# EAGLE board se8 (EAGLE 6.5.0)
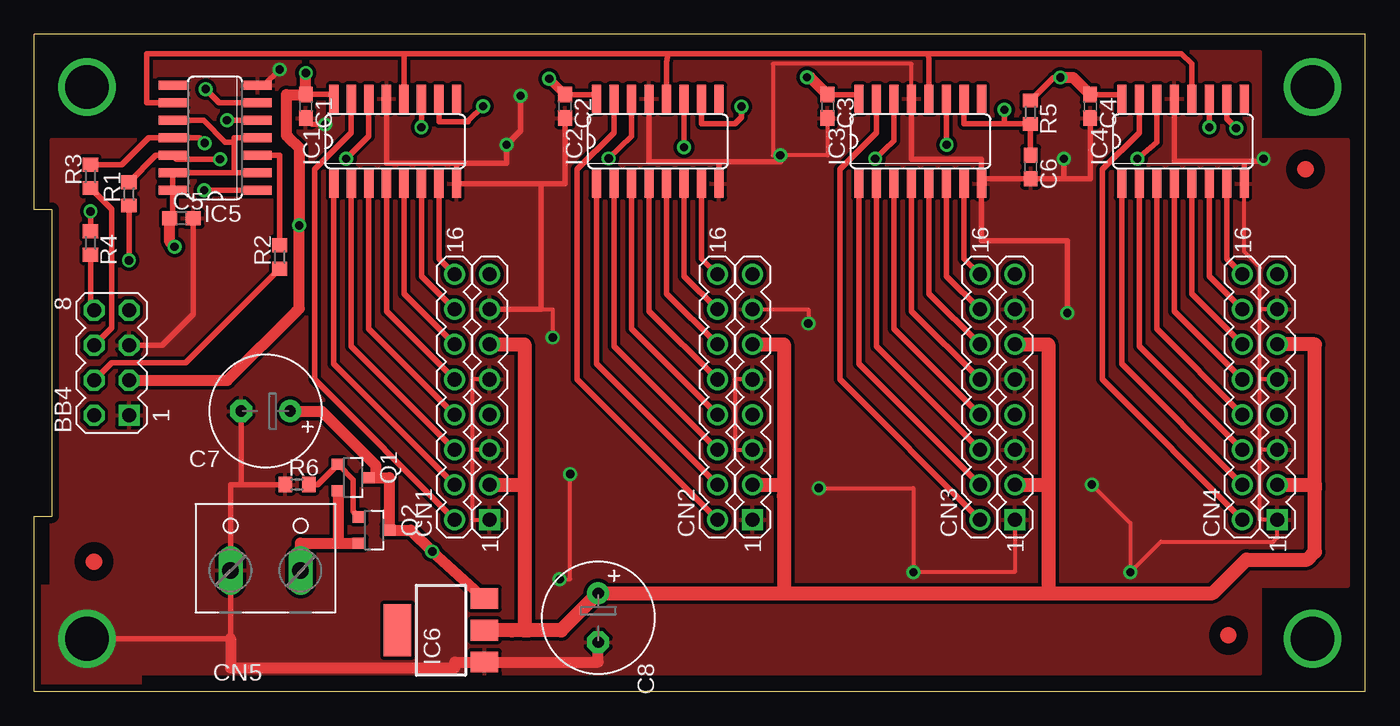
[diagram p0: board, top side]
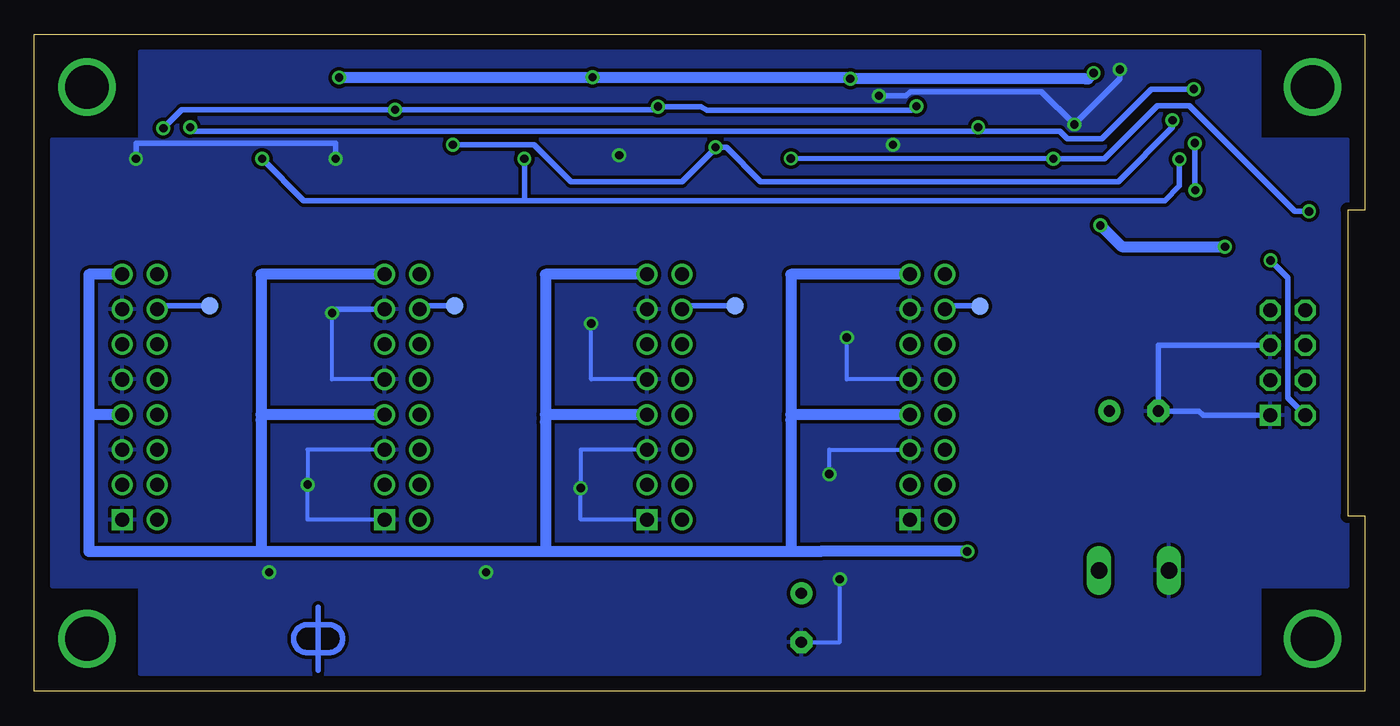
[diagram p1: board, bottom side, seen from below]

Size 96.52 x 47.62 mm. Coordinates in mm from the lower left corner, seen from the top.
Outline: 0,0 96.52,0 96.52,47.62 0,47.62 0,34.92 1.27,34.92 1.27,12.7 0,12.7 0,0
Copper layers (1*16): Top 0.035mm / dielectric 1.5mm / Bottom 0.035mm
Design rules "default *": minimum track width 10mil, minimum drill 20mil, track to track 10mil, track to pad 10mil, pad to pad 10mil, via to via 10mil, smd to smd 10mil, copper to edge 20mil, drill to drill 10mil, minimum pad ring 10mil, minimum via ring 8mil, stop-mask expansion 4mil, vias tented up to drill 0mil, thermal gap 10mil

## Footprints (pad centres in the part's own frame; a part is rotated, then mirrored left to right if it is on the bottom)
HDR-4X2 = drill 1.016 square: 1 -3.81,-1.27 | drill 1.016 octagon: 2 -3.81,1.27; 3 -1.27,-1.27; 4 -1.27,1.27; 5 1.27,-1.27; 6 1.27,1.27; 7 3.81,-1.27; 8 3.81,1.27
C0603 = smd 1.1 x 1: 1 -0.85,0; 2 0.85,0
E3.5-8 = drill 0.813 pad 1.6: + -1.778,0 | drill 0.813 pad 1.6 octagon: - 1.778,0
HDR-8X2 = drill 1.016 square: 1 -8.89,-1.27 | drill 1.016: 2 -8.89,1.27; 3 -6.35,-1.27; 4 -6.35,1.27; 5 -3.81,-1.27; 6 -3.81,1.27; 7 -1.27,-1.27; 8 -1.27,1.27; 9 1.27,-1.27; 10 1.27,1.27; 11 3.81,-1.27; 12 3.81,1.27; 13 6.35,-1.27; 14 6.35,1.27; 15 8.89,-1.27; 16 8.89,1.27
TBLK-5.08-X2 = drill 1.194 long: 1 -2.54,-0.127; 2 2.54,-0.127
TEST-POINT = smd 1.27 x 1.27: P1 0,0
SO16 = smd 0.66 x 2.032: 1 -4.445,-3.073; 2 -3.175,-3.073; 3 -1.905,-3.073; 4 -0.635,-3.073; 5 0.635,-3.073; 6 1.905,-3.073; 7 3.175,-3.073; 8 4.445,-3.073; 9 4.445,3.073; 10 3.175,3.073; 11 1.905,3.073; 12 0.635,3.073; 13 -0.635,3.073; 14 -1.905,3.073; 15 -3.175,3.073; 16 -4.445,3.073
SO14 = smd 0.66 x 2.032: 1 -3.81,-3.073; 2 -2.54,-3.073; 3 -1.27,-3.073; 4 0,-3.073; 5 1.27,-3.073; 6 2.54,-3.073; 7 3.81,-3.073; 8 3.81,3.073; 9 2.54,3.073; 10 1.27,3.073; 11 0,3.073; 12 -1.27,3.073; 13 -2.54,3.073; 14 -3.81,3.073
SOT223 = smd 1.5 x 2: 1 -2.3,-3.15; 2 0,-3.15; 3 2.3,-3.15 | smd 3.8 x 2: 4 0,3.15
SOT23 = smd 0.8 x 0.9: 1 -0.95,-1.1; 2 0.95,-1.1; 3 0,1.1
R0603 = smd 1 x 1.1: 1 -0.85,0; 2 0.85,0

## Placement (x,y rotation side)
BB4  BB4 Header  [HDR-4X2]  5.59,23.81 90 top
C1  0.1uF  [C0603]  19.68,42.42 270 top
C2  0.1uF  [C0603]  38.48,42.42 270 top
C3  0.1uF  [C0603]  57.53,42.42 270 top
C4  0.1uF  [C0603]  76.58,42.42 270 top
C5  0.1uF  [C0603]  10.67,34.29 0 top
C6  0.1uF  [C0603]  72.26,38.02 270 top
C7  100uF  [E3.5-8]  16.76,20.32 180 top
C8  100uF  [E3.5-8]  40.89,5.33 270 top
CN1  HDR-8X2-SHR  [HDR-8X2]  31.75,21.34 90 top
CN2  HDR-8X2-SHR  [HDR-8X2]  50.8,21.34 90 top
CN3  HDR-8X2-SHR  [HDR-8X2]  69.85,21.34 90 top
CN4  HDR-8X2-SHR  [HDR-8X2]  88.9,21.34 90 top
CN5  [TBLK-5.08-X2]  16.76,8.89 0 top
E$1  [TEST-POINT]  27.94,27.91 0 bottom
E$2  [TEST-POINT]  45.72,27.94 0 bottom
E$3  [TEST-POINT]  66.04,27.97 0 bottom
E$4  [TEST-POINT]  83.82,27.94 0 bottom
E$25  [P_FRAME]  0,0 0 top
IC1  74HC595  [SO16]  26.16,39.88 0 top
IC2  74HC595  [SO16]  45.21,39.88 0 top
IC3  74HC595  [SO16]  64.26,39.88 0 top
IC4  74HC595  [SO16]  83.31,39.88 0 top
IC5  74HC74  [SO14]  13.11,40.13 90 top
IC6  NCP1117A  [SOT223]  29.49,4.42 90 top
Q1  DMP2035  [SOT23]  23.11,15.49 270 top
Q2  DMP2035  [SOT23]  24.64,11.68 270 top
R1  100  [R0603]  6.86,36.07 90 top
R2  100  [R0603]  17.78,31.5 90 top
R3  100  [R0603]  4.06,37.34 90 top
R4  100  [R0603]  4.06,32.51 270 top
R5  330  [R0603]  72.24,41.99 270 top
R6  100K  [R0603]  19.05,14.99 0 top
U$1  [P_FRAME]  0,0 0 top
U$2  DP_FRAME_P  [P_FRAME]  -2.54,-2.54 0 top
U$4  [FIDUCIAL]  86.61,4.06 270 top
U$5  [FIDUCIAL]  4.32,9.4 0 top
U$6  [FIDUCIAL]  92.2,37.85 0 top
U$7  [DPI-1]  75.95,3.81 0 bottom

## Library data of the parts
BB4 = dpi-conn; VENDOR: Digikey; VENDOR-PART-NUM: 609-3530-ND
C1-C6 = dpi-passive; VENDOR: Digikey; VENDOR-PART-NUM: 1276-1126-2-ND
C7 C8 = dpi-passive; VENDOR: Digikey; VENDOR-PART-NUM: 399-6548-ND
CN1-CN4 = dpi-conn; VENDOR: Digikey; VENDOR-PART-NUM: S9171-ND
CN5 = dpi-conn; VENDOR: Digikey; VENDOR-PART-NUM: ED2609-ND
E$1-E$4 = dpi-conn
E$25 U$1 U$2 = dpi-sym
IC1-IC4 = dpi-transic; VENDOR: Digikey; VENDOR-PART-NUM: 74HC595D(BJ)CT-ND
IC5 = dpi-transic; VENDOR: Digikey; VENDOR-PART-NUM: 568-4458-1-ND
IC6 = dpi-transic; VENDOR: Digikey; VENDOR-PART-NUM: NCP1117LPST33T3GOSCT-ND
Q1 Q2 = dpi-transic; VENDOR: Digikey; VENDOR-PART-NUM: DMP2035U-7DICT-ND
R1-R4 = dpi-passive; VENDOR: Digikey; VENDOR-PART-NUM: 311-100HRTR-ND
R5 = dpi-passive; VENDOR: Digikey; VENDOR-PART-NUM: 311-330HRTR-ND
R6 = dpi-passive; VENDOR: Digikey; VENDOR-PART-NUM: 311-100KHRTR-ND
U$4-U$7 = DP

## Nets
+3V3: BB4.3 C1.1 C2.1 C3.1 C4.1 C5.1 IC1.16 IC2.16 IC3.16 IC4.16 IC5.2 IC5.4 IC5.10 IC5.13 IC5.14 R5.1
GND: BB4.1 BB4.5 C1.2 C2.2 C3.2 C4.2 C5.2 C6.2 C7.- C8.- CN1.1 CN1.5 CN1.9 CN1.13 CN2.1 CN2.5 CN2.9 CN2.13 CN3.1 CN3.5 CN3.9 CN3.13 CN4.1 CN4.5 CN4.9 CN4.13 CN5.1 IC1.8 IC1.13 IC2.8 IC2.13 IC3.8 IC3.13 IC4.8 IC4.13 IC5.7 IC6.1 R6.1
N$1: BB4.8 R4.2
N$2: CN4.2 IC4.15
N$3: IC1.12 IC2.12 IC3.12 IC4.12 IC5.9
N$4: IC2.11 IC3.11 IC5.5
N$7: CN4.4 IC4.1
N$8: CN4.6 IC4.2
N$9: CN4.8 IC4.3
N$10: CN4.10 IC4.4
N$12: CN4.12 IC4.5
N$13: CN4.14 IC4.6
N$14: CN4.16 IC4.7
N$15: CN3.2 IC3.15
N$16: CN3.4 IC3.1
N$17: CN3.6 IC3.2
N$18: CN3.8 IC3.3
N$19: CN3.10 IC3.4
N$20: CN3.12 IC3.5
N$21: CN3.14 IC3.6
N$22: CN3.16 IC3.7
N$23: CN2.2 IC2.15
N$24: CN2.4 IC2.1
N$25: CN2.6 IC2.2
N$26: CN2.8 IC2.3
N$28: CN2.10 IC2.4
N$29: CN2.12 IC2.5
N$30: BB4.2 R1.1
N$31: CN2.14 IC2.6
N$32: CN2.16 IC2.7
N$34: IC5.3 R2.2
N$35: IC3.14 IC4.14 IC5.12 R1.2
N$36: IC5.1 IC5.11 R3.2
N$37: IC1.14 IC2.14 R4.1
N$38: BB4.6 R3.1
N$39: IC1.11 IC4.11 IC5.6
N$41: BB4.4 R2.1
N$42: CN1.2 IC1.15
N$56: CN1.4 IC1.1
N$61: CN1.6 IC1.2
N$65: CN1.8 IC1.3
N$66: C6.1 IC1.10 IC2.10 IC3.10 IC4.10 R5.2
N$67: CN1.10 IC1.4
N$72: CN1.12 IC1.5
N$74: CN1.14 IC1.6
N$76: CN1.16 IC1.7
N$77: C7.+ CN1.7 CN1.15 CN2.7 CN2.15 CN3.7 CN3.15 CN4.7 CN4.15 IC6.3 Q1.3 Q2.3
N$79: CN5.2 Q1.2 Q2.2
N$80: Q1.1 Q2.1 R6.2
N$82: C8.+ CN1.3 CN1.11 CN2.3 CN2.11 CN3.3 CN3.11 CN4.3 CN4.11 IC6.2
VCC: BB4.7

## Tracks (layer width: path | path; a pad name or v marks a point on that pad's centre or on a via)
+3V3  (via drill 0.6)
  Top 0.406: C4.1 78.87,43.27 IC4.16 | C3.1 59.82,43.27 IC3.16 | C2.1 40.77,43.27 IC2.16 | 21.72,43.27 IC1.16 21.72,43.29 19.71,43.29 | C5.1 10.03,34.29 IC5.14 IC5.13 14.5,37.59 | 14.5,37.59 IC5.2 | IC5.4 14.5,40.13 14.5,39.73 | R5.1 73.9,44.5 v74.42,44.5 | 14.5,39.73 14.5,37.59 | IC5.10 12.27,41.4 13.84,39.83 14.4,39.83 14.5,39.73
  Top 0.61: C2.1 v37.34,44.41
  Top 0.813: BB4.3 13.98,22.54 18.97,27.53 19.2,27.76 v19.2,33.78 19.2,39.4 18.41,40.18 18.29,40.31 18.29,43.27 C1.1 | v10.16,32.23 9.82,32.58 C5.1 | C1.1 19.71,43.29 | C3.1 56.27,44.53 v56.03,44.53 | C4.1 75.35,44.5 v74.42,44.5 | C1.1 v19.68,44.83
  Bottom 0.813: v19.2,33.78 17.65,32.23 v10.16,32.23 | v74.42,44.5 74.4,44.53 v56.03,44.53 37.34,44.53 v37.34,44.41 20.28,44.41 20.11,44.41 v19.68,44.83
GND  (via drill 0.6, 3.17 pad 3.17)
  Top 0.305: 88.9,17.25 88.9,12.45 CN4.1 90.17,11.15 89.86,10.85 81.71,10.85 v79.5,8.64 79.5,12.19 v76.71,14.99 | 88.9,17.25 88.9,22.63 | 88.9,22.63 88.9,27.58 | 88.9,27.58 88.9,30.73 87.76,31.88 IC4.8 | CN4.13 88.9,27.69 88.9,27.58 | CN4.9 88.9,22.61 88.9,22.63 | CN4.5 88.9,17.53 88.9,17.25 | CN3.1 71.12,8.64 v63.75,8.64 63.75,14.73 v56.9,14.73 | CN2.13 56.13,27.69 v56.13,26.67 | CN2.9 50.8,22.61 50.8,17.53 CN2.5 | v38.1,8.13 38.86,8.13 v38.86,15.75 | CN1.5 31.75,17.53 | 31.75,17.53 31.75,12.45 CN1.1 | 36.75,27.69 37.59,27.69 v37.59,25.65 | CN1.9 31.75,22.61 31.75,17.53 | IC3.13 63.63,45.49 53.57,45.49 53.57,38.86 v54.1,38.86 57.53,38.86 C3.2
  Top 0.406: 74.91,37.17 C6.2 68.71,37.17 IC3.8 | 74.91,37.17 76.58,37.17 C4.2 | 36.75,36.8 IC1.8 30.61,38.3 | 36.75,36.8 38.48,36.8 C2.2 | BB4.5 9.26,25.08 11.46,27.28 11.52,27.34 C5.2 | IC3.8 68.71,38.58 66.8,38.58 63.63,38.58 IC3.13 | IC4.13 82.68,38.43 85.9,38.43 87.76,38.43 | 87.76,38.43 IC4.8 | IC2.13 44.58,38.38 47.9,38.38 49.66,38.38 | 49.66,38.38 IC2.8 | IC1.13 25.53,38.3 29.87,38.3 30.61,38.3 | IC5.7 16.64,43.94 v17.78,45.09 | v21.08,41.1 20.16,41.1 C1.2 | v35.26,43.18 35.26,40.64 v34.24,39.62 34.24,38.3 30.61,38.3 | 49.66,38.38 54.1,38.38 v54.1,38.86 | v74.68,38.61 74.68,37.17 74.91,37.17 | 87.76,38.43 89.15,38.43 v89.15,38.61 | C7.- 14.99,14.99 R6.1 14.22,14.99 CN5.1 14.22,3.81 | CN1.13 36.75,27.69 36.75,36.8 | IC3.8 68.71,32.66 74.75,32.66 74.93,32.66 v74.93,27.43 | v3.81,3.81 13.64,3.81 | 13.64,3.81 14.22,3.81 | 14.22,3.81 13.64,3.81
  Top 0.813: C8.- 40.89,2.12 IC6.1 30.48,2.12 30.48,1.7 14.22,1.7 14.22,3.81
  Bottom 0.305: CN3.9 74.93,22.61 v74.93,27.43 | CN3.5 76.71,17.53 v76.71,14.99 76.71,12.45 CN3.1 | CN2.1 56.9,12.45 v56.9,14.73 56.9,17.53 CN2.5 | CN2.9 56.13,22.61 v56.13,26.67 | C8.- 38.1,3.56 v38.1,8.13 | v38.86,15.75 38.86,17.53 CN1.5 | CN1.9 37.59,22.61 v37.59,25.65
  Bottom 0.406: v17.78,45.09 17.78,44.4 v21.08,41.1 23.47,43.48 32.99,43.48 33.3,43.18 v35.26,43.18 | v89.15,38.61 89.15,39.75 75.29,39.75 74.68,39.75 v74.68,38.61 | BB4.1 11.75,20 12.06,20.32 C7.- 14.99,25.08 BB4.5 | CN3.13 74.93,27.69 v74.93,27.43
  pour Bottom: 1.27,7.62 1.27,40.01 7.62,40.01 7.62,46.35 88.9,46.35 88.9,40.01 95.25,40.01 95.25,7.62 88.9,7.62 88.9,1.27 7.62,1.27 7.62,7.62
  pour Top: 0.51,0.51 0.51,7.62 1.27,7.62 1.27,40.01 7.62,40.01 7.62,46.35 88.9,46.35 88.9,40.01 95.25,40.01 95.25,7.62 88.9,7.62 88.9,1.27 7.62,1.27 7.62,0.51
MOUNT1  (via drill 3.17 pad 3.17)
  other vias: 3.81,43.81
MOUNT6  (via drill 3.17 pad 3.17)
  other vias: 92.71,43.81
N$1
  Top 0.406: R4.2 4.06,27.88 BB4.8
N$2
  Top 0.406: IC4.15 80.14,40.51 77.47,37.85 77.47,22.61 CN4.2
N$3
  Top 0.406: 26.87,46.23 8.15,46.23 8.15,42.67 IC5.9 | 26.87,46.23 45.95,46.23 | 45.95,46.23 64.85,46.23 | 64.85,46.23 83.19,46.23 83.95,45.49 IC4.12 | IC3.12 64.9,45.67 64.85,46.23 | IC2.12 45.85,45.62 45.95,46.23 | IC1.12 26.8,46.18 26.87,46.23
N$4  (via drill 0.6)
  Top 0.406: v47.12,39.45 IC2.11 | IC3.11 v66.17,39.62 | IC5.5 v13.97,41.4
  Bottom 0.406: v66.17,39.62 60.27,39.62 57.58,36.93 49.53,36.93 47.14,39.34 v47.12,39.45 46.33,39.45 43.84,36.96 17.91,36.96 13.97,40.89 v13.97,41.4
N$7
  Top 0.406: IC4.1 78.87,23.75 CN4.4
N$8
  Top 0.406: IC4.2 80.14,25.02 CN4.6
N$9
  Top 0.406: IC4.3 81.41,26.29 CN4.8
N$10
  Top 0.406: IC4.4 82.68,27.56 CN4.10
N$12
  Top 0.406: IC4.5 83.95,28.83 CN4.12
N$13
  Top 0.406: IC4.6 85.22,30.1 CN4.14
N$14
  Top 0.406: IC4.7 86.49,31.37 CN4.16
N$15
  Top 0.406: IC3.15 61.09,40.51 58.42,37.85 58.42,22.61 CN3.2
N$16
  Top 0.406: IC3.1 59.82,23.75 CN3.4
N$17
  Top 0.406: IC3.2 61.09,25.02 CN3.6
N$18
  Top 0.406: IC3.3 62.36,26.29 CN3.8
N$19
  Top 0.406: IC3.4 63.63,27.56 CN3.10
N$20
  Top 0.406: IC3.5 64.9,28.83 CN3.12
N$21
  Top 0.406: IC3.6 66.17,30.1 CN3.14
N$22
  Top 0.406: IC3.7 67.44,31.37 CN3.16
N$23
  Top 0.406: IC2.15 42.04,40.51 39.37,37.85 39.37,22.61 CN2.2
N$24
  Top 0.406: IC2.1 40.77,23.75 CN2.4
N$25
  Top 0.406: IC2.2 42.04,25.02 CN2.6
N$26
  Top 0.406: IC2.3 43.31,26.29 CN2.8
N$28
  Top 0.406: IC2.4 44.58,27.56 CN2.10
N$29
  Top 0.406: IC2.5 45.85,28.83 CN2.12
N$30  (via drill 0.6)
  Top 0.406: R1.1 v6.86,31.24
  Bottom 0.406: v6.86,31.24 5.59,29.97 5.59,23.8 5.59,21.27 BB4.2
N$31
  Top 0.406: IC2.6 47.12,30.1 CN2.14
N$32
  Top 0.406: IC2.7 48.39,31.37 CN2.16
N$34
  Top 0.406: IC5.3 17.78,38.86 R2.2
N$35  (via drill 0.6)
  Top 0.406: R1.2 8.8,38.86 IC5.12 10.31,38.58 v13.46,38.58 | v80.01,38.61 81.41,39.83 IC4.14 | IC3.14 62.36,39.93 v60.98,38.61
  Bottom 0.406: v80.01,38.61 76.99,35.59 60.98,35.59 | 60.98,35.59 59.38,35.59 17.25,35.59 14.53,35.59 13.46,36.65 v13.46,38.58 | v60.98,38.61 60.98,35.59
N$36  (via drill 0.6)
  Top 0.406: R3.2 6.34,38.19 8.2,40.06 8.28,40.13 IC5.11 11.96,40.13 v12.34,39.75 | 16.26,36.32 IC5.1 v12.32,36.32
  Bottom 0.406: v12.34,39.75 12.34,37.11 12.34,36.35 v12.32,36.32
N$37  (via drill 0.6)
  Top 0.406: IC1.14 24.26,40.26 v22.61,38.61 | v41.66,38.63 43.31,40.26 IC2.14 | R4.1 v4.06,34.8
  Bottom 0.406: v41.66,38.63 v22.61,38.61 18.92,38.61 15.06,42.47 12.75,42.47 5.08,34.8 v4.06,34.8
N$38
  Top 0.406: BB4.6 5.59,26.35 5.59,28.96 5.59,34.96 R3.1
N$39  (via drill 0.6)
  Top 0.406: IC5.6 13.41,42.67 v12.42,43.66 | v28.07,40.89 IC1.11 | IC4.11 v85.22,40.89
  Bottom 0.406: v12.42,43.66 15.29,43.66 15.49,43.66 19.1,40.06 21.59,40.06 22.15,40.62 28.07,40.62 | 28.07,40.62 v28.07,40.89 28.07,40.62 | v85.22,40.89 85.22,40.62 28.85,40.62 28.07,40.62
N$41
  Top 0.406: BB4.4 4.33,22.54 5.61,23.82 10.96,23.82 R2.1
N$42
  Top 0.406: IC1.15 22.99,40.51 20.32,37.85 20.32,22.61 CN1.2
N$56
  Top 0.406: IC1.1 21.72,23.75 CN1.4
N$61
  Top 0.406: IC1.2 22.99,25.02 CN1.6
N$65
  Top 0.406: IC1.3 24.26,26.29 CN1.8
N$66  (via drill 0.6)
  Top 0.406: C6.1 72.24,38.87 R5.2 70.84,41.14 | IC4.10 86.49,41.53 v87.17,40.82 | IC2.10 48.39,41.15 50.8,41.15 51.28,41.63 v51.28,42.39 | IC1.10 29.34,41.3 31.47,41.3 31.47,41.35 v32.54,42.42 | 70.84,41.14 70.36,41.14 v70.36,42.16 | IC3.10 67.44,41.14 70.84,41.14
  Bottom 0.406: v87.17,40.82 85.85,42.16 v70.36,42.16 51.51,42.16 v51.28,42.39 | 51.26,42.42 v51.28,42.39 | v32.54,42.42 32.89,42.14 47.75,42.14 48.18,42.39 v51.28,42.39
N$67
  Top 0.406: IC1.4 25.53,27.56 CN1.10
N$72
  Top 0.406: IC1.5 26.8,28.83 CN1.12
N$74
  Top 0.406: IC1.6 28.07,30.1 CN1.14
N$76
  Top 0.406: IC1.7 29.34,31.37 CN1.16
N$77  (via drill 0.6)
  Top 0.813: Q1.3 24.99,15.49 | 24.99,15.49 25.74,15.49 Q2.3 27.29,11.68 v28.85,10.13 IC6.3 | C7.+ 20.83,20.32 24.77,16.38 24.77,15.72 24.99,15.49
  Bottom 0.813: v28.85,10.13 39.5,10.13 41.66,10.13 | CN4.15 92.58,30.23 92.58,26.72 92.58,19.91 | 92.58,19.91 92.58,10.13 80.09,10.13 | 80.09,10.13 59.46,10.13 | 59.46,10.13 41.66,10.13 | CN4.7 92.58,20.07 92.58,19.91 | CN2.15 59.46,30.23 59.46,19.53 | 59.46,19.53 59.46,10.13 | CN1.15 41.66,30.23 41.66,19.68 | 41.66,19.68 41.66,10.13 | CN3.15 80.09,30.23 80.09,19.66 | 80.09,19.66 80.09,10.13 | CN3.7 80.09,20.07 80.09,19.66 | CN2.7 59.46,20.07 59.46,19.53 | CN1.7 41.66,20.07 41.66,19.68
N$78  (via drill 3.17 pad 3.17)
  other vias: 92.71,3.81
N$79
  Top 0.813: CN5.2 19.3,10.73 22.17,10.73 | 22.17,10.73 Q2.2 | Q1.2 22.01,10.73 22.17,10.73
N$80
  Top 0.406: R6.2 20.56,14.99 Q1.1 23.11,15.34 23.11,13.97 23.11,13.06 Q2.1
N$82
  Top 1.016: 54.36,7.11 C8.+ 38.2,4.42 35.84,4.42 | 54.36,7.11 73.53,7.11 | 73.53,7.11 85.47,7.11 87.91,9.55 92.33,9.55 92.89,10.11 92.89,14.71 | 92.89,14.71 92.89,25.15 CN4.11 | CN4.3 92.89,14.99 92.89,14.71 | CN3.3 73.53,14.99 73.53,14.68 | 73.53,14.68 73.53,7.11 | CN3.11 73.53,25.15 73.53,14.68 | CN2.3 54.36,14.99 54.36,14.15 | 54.36,14.15 54.36,7.11 | CN2.11 54.36,25.15 54.36,14.15 | CN1.11 35.53,25.15 35.53,14.86 | CN1.3 35.53,14.99 35.53,14.86 | IC6.2 34.62,4.42 35.84,4.42 | 35.53,14.86 35.53,4.42 35.84,4.42
S$1
  Bottom 0.406: 28.55,27.94 29.79,27.94
S$2
  Bottom 0.406: 46.28,27.94 48.82,27.94 48.84,27.91
S$3
  Bottom 0.406: 66.62,27.94 67.89,27.94 67.92,27.91
S$4
  Bottom 0.406: 84.33,27.94 86.94,27.94

## Text on the board
tTest: 3.8 Inches | 3.5 Inches | (C) 2017, Demand Peripherals, Inc. | C1 | C2 | C3 | C4 | R5 | R3 | R1 | C6 | IC1 | IC2 | IC3 | IC4 | IC5 | C5 | R4 | R2 | 1 | 2 | 4 | 6 | 0 | BB4 | 3 | 5 | 7 | 1.575 Inches | 1.875 Inches | Gnd | 5V | SE8, Rev 17A